# Altium PCB Controller.PcbDoc
Units mil, origin at the board's own origin, x right, y up, seen from the top; angles counter-clockwise.
Board outline 980.28 x 1985.28 mil, 2 copper layers (Top1, Bottom2), stack 63.824 mil thick; 71 components, 71 nets, 314 pads, 182 vias.
Unrouted connection lines stored in the file: 57.
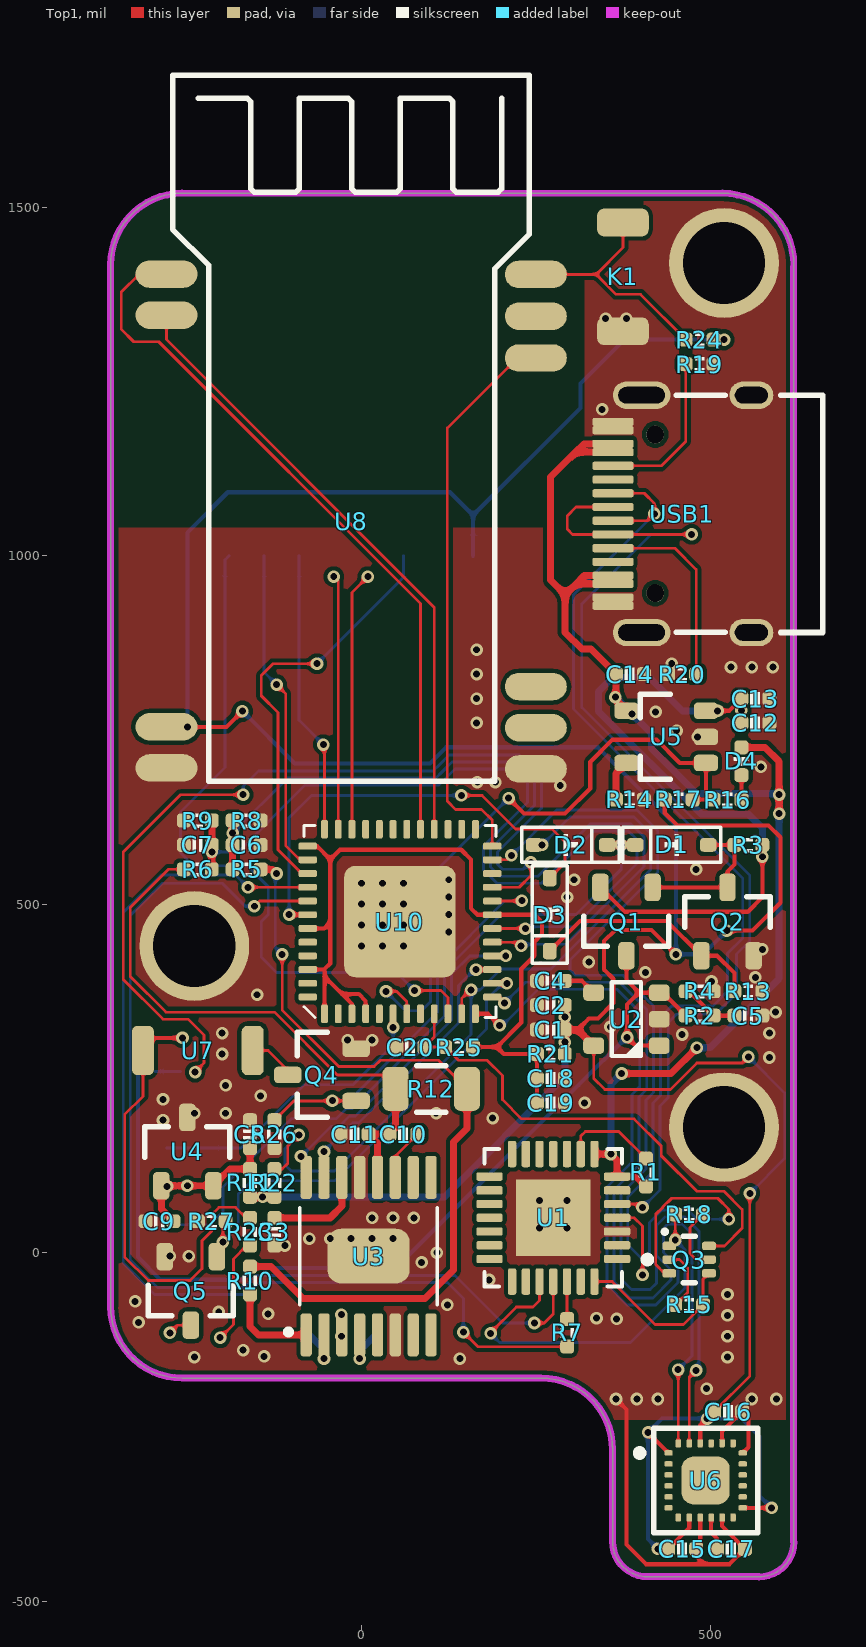
[diagram p0: Top1 view]
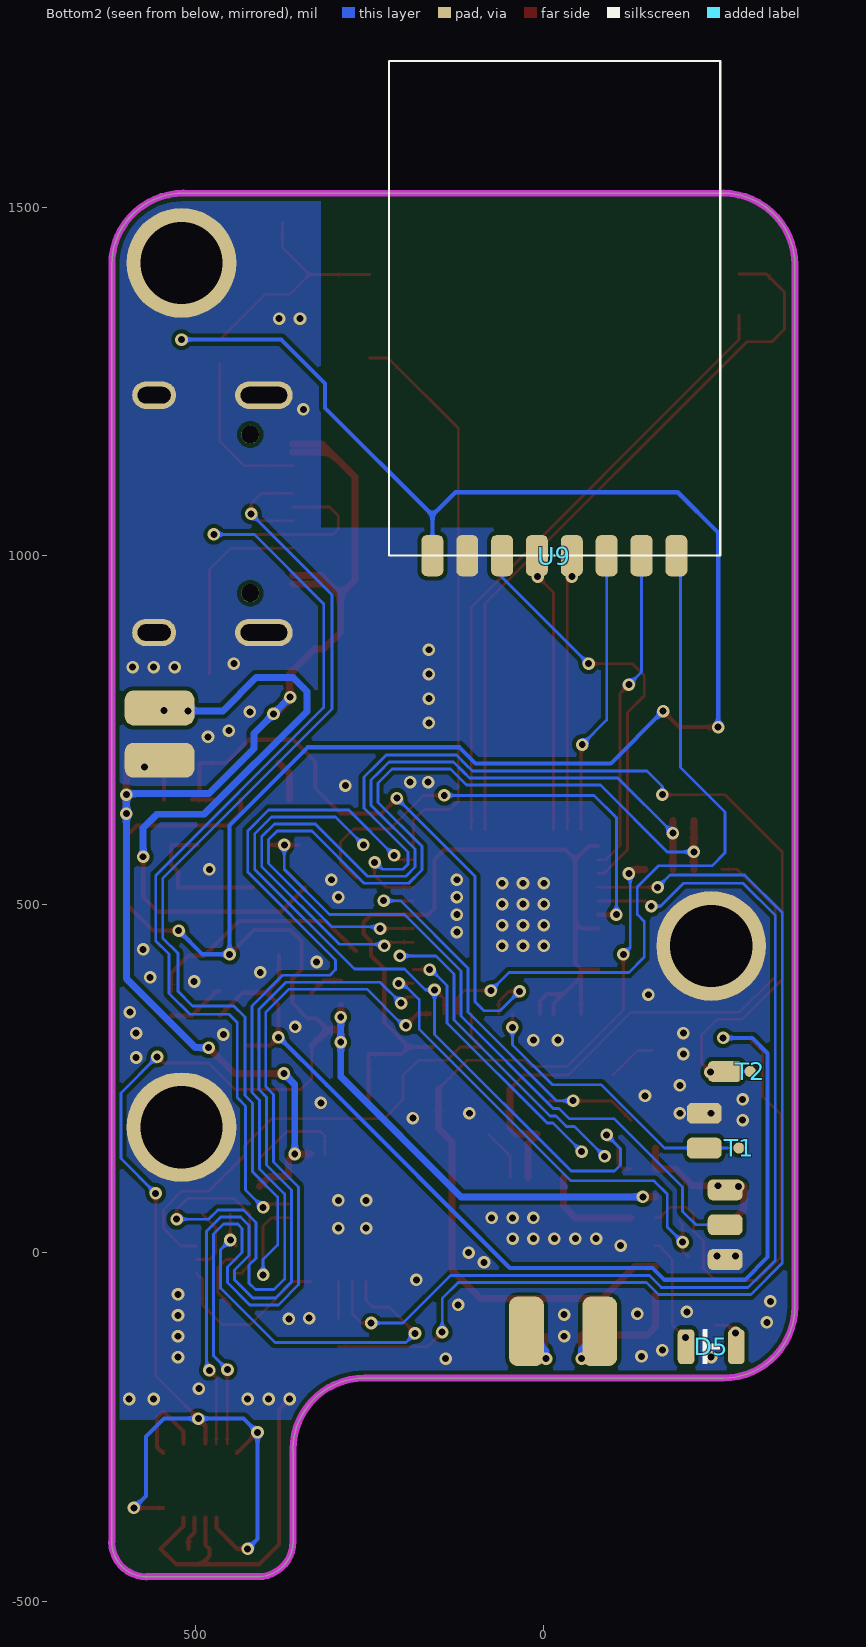
[diagram p1: Bottom2 view, seen from below]
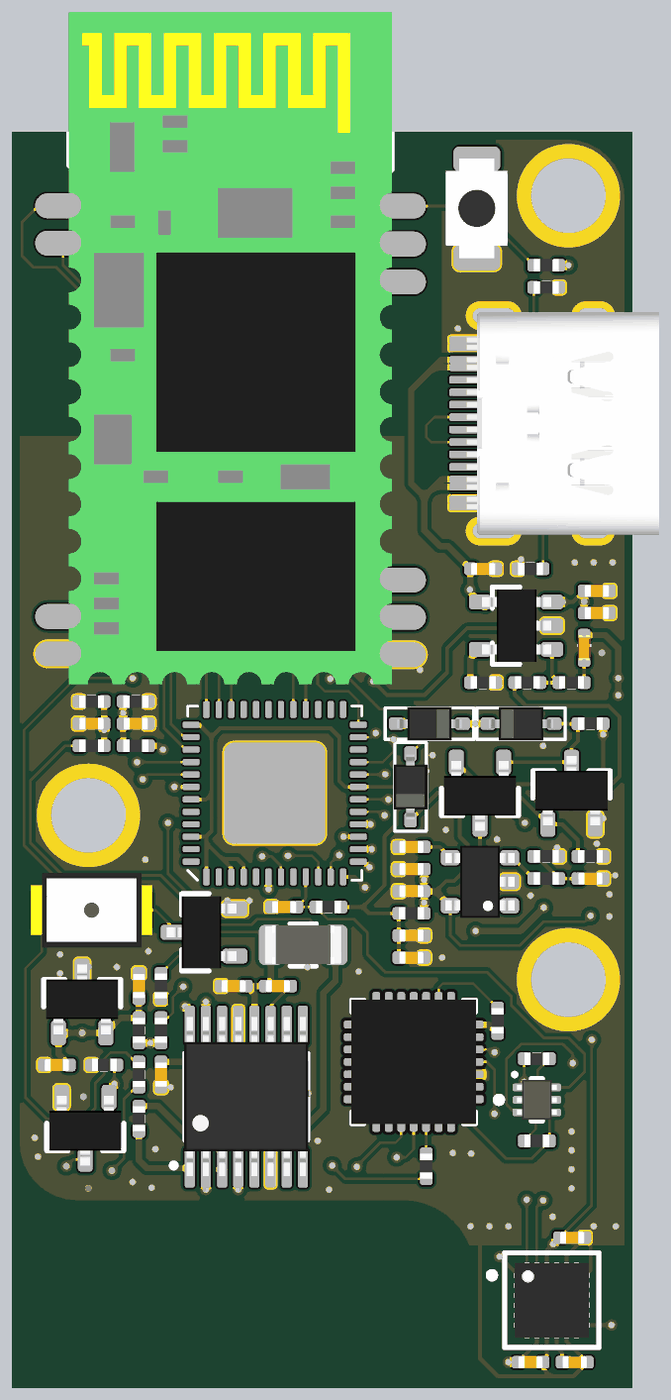
[diagram p2: 3D render of the assembled board from above, using the file's embedded part models]

## Layer stack, top to bottom
Top Solder: solder mask 0.4, Solder Resist, Dk 3.5
Top1: signal copper 1.4
Dielectric1: core 61.0236, FR-4, Dk 4.2
Bottom2: signal copper 1.4
Bottom Solder: solder mask 0.4, Solder Resist, Dk 3.5

## Board outline
-360.03,-77.5 ccw(c-257.5,-77.5) -257.5,-180.03 -257.5,-180 257.5,-180 257.5,-179.97 cw(c257.5,-282.5) 360.03,-282.5 360,-282.5 360,-414.75 ccw(c410.25,-414.75) 410.25,-465 410,-465 570,-465 570,-465.25 ccw(c570,-415) 620.25,-415 620,-415 620,-180 620,1415 620.03,1417.5 ccw(c517.5,1417.5) 517.5,1520.03 520,1520 -257.5,1520 -257.5,1520.03 ccw(c-257.5,1417.5) -360.03,1417.5 -360,1417.5

## Design rules (kind name [scope] priority, off if disabled: settings)
Clearance Clearance_Logo [InNetClass('Logo')] p1: gap=8 ignorepadtopadclearanceinfootprint=FALSE
Clearance [All] p2: gap=6 ignorepadtopadclearanceinfootprint=FALSE
ComponentClearance [All] p1: gap=0 collisioncheckmode=3 verticalgap=0 showdistances=FALSE
DiffPairsRouting [All] p1: maxlimit=9 minlimit=9 mostfreqgap=9 toplayer_minwidth=15 toplayer_maxwidth=15 toplayer_prefwidth=15 bottomlayer_minwidth=15 bottomlayer_maxwidth=15 bottomlayer_prefwidth=15 maxuncoupledlength=500
FanoutControl Fanout_BGA [All] p1: bgadir=Out bgaviamode=Centered fanoutstyle=Auto fanoutdirection=Alternating viagrid=1 // Fanout_BGA (Default Rule)
HoleSize [All] p1: absolutevalues=TRUE maxlimit=10000 minlimit=8 maxpercent=80.000 minpercent=20.000
MinimumSolderMaskSliver [All] p1 off: minsoldermaskwidth=2
PlaneClearance [All] p1: clearance=8
PlaneConnect [All] p1: planeconnectstyle=Direct reliefexpansion=20 reliefentries=4 reliefconductorwidth=10 reliefairgap=10
PolygonConnect [All] p1: connectstyle=Direct reliefconductorwidth=10 reliefentries=4 polygonreliefangle="90 Angle" airgapwidth=10
RoutingVias [All] p1: holewidth=8 width=16 viastyle="Through Hole" minholewidth=6 minwidth=12 maxholewidth=28 maxwidth=50
SilkToSilkClearance [All] p1: silktosilkclearance=0
SilkToSolderMaskClearance [IsPad] p1: minsilkscreentomaskgap=0 clearancetoexposedcopper=TRUE
SolderMaskExpansion [All] p1: expansion=3 istentingtop=FALSE
Width Logo [InNetClass('Logo')] p1: maxlimit=100 minlimit=0.1 preferedwidth=10
Width GND [(InNet('AGND') OR InNet('GND'))] p2: maxlimit=50 minlimit=4 preferedwidth=10
Width VCC [(InNet('VDD_SYS_3.3V') OR InNet('VDD_AV_3.3V') OR InNet('VDD_5V') OR InNet('VDD1V2-SYS') OR InNet('VDD1V1-EPHY') OR InNet('VDD-CPUX') OR InNet('VDD-CPUS') OR InNet('VDD-CPUFB') OR InNet('VCC-DRAM'))] p3: maxlimit=50 minlimit=4 preferedwidth=10
Width [All] p4: maxlimit=10000 minlimit=4 preferedwidth=4
21 further rules are at their usual default settings.

## Components (designator, comment, footprint, x,y, rotation, side; value= is the part's Value field where it differs from the comment)
C1 "0.1uF" CAP_0402 271.5,320 r0 top value=0.1u
C2 "10uF" CAP_0402 271.5,355 r0 top value=0.1u
C3 "2.2uF" CAP_0402 -125,30 r90 top value=0.1u
C4 "10nF" CAP_0402 271.5,390 r0 top value=0.1u
C5 "0.1uF" CAP_0402 555,340 r180 top value=0.1u
C6 "10uF" CAP_0402 -165,585 r180 top value=0.1u
C7 "10uF" CAP_0402 -235,585 r0 top value=0.1u
C8 "10uF" CAP_0402 -160,170 r270 top value=0.1u
C9 "10uF" CAP_0402 -290,45 r0 top value=0.1u
C10 "10nF" CAP_0402 60,170 r0 top value=0.1u
C11 "10uF" CAP_0402 -10,170 r0 top value=0.1u
C12 "10uF" CAP_0402 565,760 r180 top value=0.1u
C13 "0.1uF" CAP_0402 565,795 r180 top value=0.1u
C14 "10uF" CAP_0402 385,830 r180 top value=0.1u
C15 "0.1uF" CAP_0402 460,-425 r0 top value=0.1u
C16 "10nF" CAP_0402 526,-228 r0 top value=0.1u
C17 "0.1uF" CAP_0402 530,-425 r180 top value=0.1u
C18 "10uF" CAP_0402 271.5,250 r180 top value=0.1u
C19 "0.1uF" CAP_0402 271.5,215 r180 top value=0.1u
C20 "1uF" CAP_0402 70,295 r180 top value=0.1u
D1 "二极管-5819W" SOD-323 445,585 r180 top
D2 "二极管-5819W" SOD-323 300,585 r0 top
D3 "二极管-5819W" SOD-323 270,485 r270 top
D4 "color?" LED_0402_RED 545,705 r270 top
D5 "color?" LED_0805_RED -240,-135 r180 bottom
K1 "TACT 2P" ButtonTACT_3x4x2_180 375,1400 r270 top value=3x4
Q1 "AO3401A" SOT23-3 380,475 r270 top
Q2 "AO3400A" SOT23-3 525,475 r90 top
Q3 "BC847BVC-7" SOT563-6 470,-10 r270 top
Q4 "AO3400A" SOT23-3 -57,255 r180 top
Q5 "AO3400A" SOT23-3 -245,-55 r270 top
R1 "10K" RES_0402 408,115 r90 top value=22R
R2 "100K" RES_0402 485,340 r180 top value=22R
R3 "20K" RES_0402 555,585 r180 top value=22R
R4 "100K" RES_0402 485,375 r180 top value=22R
R5 "20K" RES_0402 -165,550 r0 top value=22R
R6 "20K" RES_0402 -235,550 r180 top value=22R
R7 "200R" RES_0402 295,-115 r90 top value=22R
R8 "10K" RES_0402 -165,620 r180 top value=22R
R9 "10K" RES_0402 -235,620 r0 top value=22R
R10 "47K" RES_0402 -160,-40 r90 top value=22R
R11 "120R" RES_0402 -160,100 r90 top value=22R
R12 "1R" 1206-RES 100,235 r0 top value=22R
R13 "20K" RES_0402 555,375 r180 top value=22R
R14 "2K" RES_0402 385,650 r0 top value=22R
R15 "12K" RES_0402 470,-75 r180 top value=22R
R16 "1K" RES_0402 525,650 r180 top value=22R
R17 "10K" RES_0402 455,650 r180 top value=22R
R18 "12K" RES_0402 470,55 r0 top value=22R
R19 "5.1K" RES_0402 485,1275 r180 top value=22R
R20 "5.1K" RES_0402 460,830 r180 top value=22R
R21 "0R" RES_0402 271.5,285 r180 top value=22R
R22 "10K" RES_0402 -125,100 r90 top value=22R
R23 "10K" RES_0402 -160,30 r90 top value=22R
R24 "47K" RES_0402 485,1310 r180 top value=22R
R25 "10K" RES_0402 140,295 r180 top value=22R
R26 "10K" RES_0402 -125,170 r90 top value=22R
R27 "10K" RES_0402 -215,45 r0 top value=22R
T1 "测试点" TEST_PT -280,150.01 r0 bottom
T2 "测试点" TEST_PT -296,260.01 r0 bottom
U1 "CP2102" QFN-28 275,50 r180 top value=Value
U2 "LP2992 3V3" SOT23-5#1 380,335 r180 top
U3 "DRV8833PW" TSSOP-16 10,-5 r90 top
U4 "TL431IDBZT" SOT23-3 -250,145 r90 top
U5 "MCP73831T" SOT23-5#2 435,740 r180 top
U6 "MPU9250" QFN-24-3x3 493.62,-326.85 r0 top
U7 "DET402" DET402 -235,290 r0 top
U8 "HC-06" 蓝牙模块HC-06 -270,628.62 r0 top locked
U9 "NRF24L01" NRF24L01-MODULE 160,1000 r180 bottom
U10 "ESP32_SIP" QFN-48_7X7 55,475 r90 top
USB1 "Type-C" Type-C-TOP 460,1060 r0 top

## Footprints (in the part's own frame and the unit in brackets; to place one, negate y for a bottom-side part, rotate by r counter-clockwise, add the part's x,y. Pads: shape width x height; smd on the part's side, far side on the other; paste and mask are expansions set on the pad)
1206-RES [mil]
  rrect50% 37.64x63.38 smd paste+0 mask+0: 1(-51.22,0) 2(51.22,0)
  silkscreen extent -21,-33 21,33, body extent -61,-31 61,31, height 26
ButtonTACT_3x4x2_180 [mil]
  rrect50% 40x74 smd: 1(-78,0) 2(78,0)
  body extent -79,-49 79,49, height 63
CAP_0402 [mil]
  rrect50% 20x20 smd: 1(-20,0) 2(20,0)
  silkscreen extent -6,-9 6,9, body extent -20,-10 20,10, height 20
DET402 [mm]
  rrect50% 0.8x1.8 smd: 1(-2,0) 2(2,0)
  body extent -2.45,-1.5 2.44,1.5, height 2.03
LED_0402_RED [mil]
  rrect50% 20x20 smd: 1(-20,0) 2(20,0)
  silkscreen extent -6,-11 6,10, body extent -20,-10 20,10, height 18
LED_0805_RED [mil]
  rrect50% 24x50 smd: 1(-36,0) 2(36,0)
  silkscreen extent -12,-24 12,24, body extent -40,-25 40,25, height 43
NRF24L01-MODULE [mm]
  rrect50% 0.8x1.5 smd: 1(0,0) 2(1.27,0) 3(2.54,0) 4(3.81,0) 5(5.08,0) 6(6.35,0) 7(7.62,0) 8(8.89,0)
  silkscreen extent -1.57,0 10.49,18.03
QFN-24-3x3 [mm]
  rrect50% 0.3x0.2 smd paste+0 mask+0: 1(-1.35,1) 2(-1.35,0.6) 3(-1.35,0.2) 4(-1.35,-0.2) 5(-1.35,-0.6) 6(-1.35,-1) 13(1.35,-1) 14(1.35,-0.6) 15(1.35,-0.2) 16(1.35,0.2) 17(1.35,0.6) 18(1.35,1)
  rrect50% 0.2x0.3 smd paste+0 mask+0: 7(-1,-1.35) 8(-0.6,-1.35) 9(-0.2,-1.35) 10(0.2,-1.35) 11(0.6,-1.35) 12(1,-1.35) 19(1,1.35) 20(0.6,1.35) 21(0.2,1.35) 22(-0.2,1.35) 23(-0.6,1.35) 24(-1,1.35)
  rrect50% 1.75x1.75 smd paste-1000 mask+0: 25(0,0)
  silkscreen extent -2.53,-1.9 1.9,1.9, body extent -1.52,-1.52 1.52,1.52, height 1
QFN-28 [mil]
  rrect50% 38x12 smd mask+5: 1(-91.5,59.06) 2(-91.5,39.37) 3(-91.5,19.68) 4(-91.5,0) 5(-91.5,-19.68) 6(-91.5,-39.37) 7(-91.5,-59.06) 15(91.5,-59.06) 16(91.5,-39.37) 17(91.5,-19.68) 18(91.5,0) 19(91.5,19.68) 20(91.5,39.37) 21(91.5,59.06)
  rrect50% 12x38 smd mask+5: 8(-59.06,-91.5) 9(-39.37,-91.5) 10(-19.69,-91.5) 11(0,-91.5) 12(19.68,-91.5) 13(39.37,-91.5) 14(59.06,-91.5) 22(59.06,91.5) 23(39.37,91.5) 24(19.68,91.5) 25(0,91.5) 26(-19.69,91.5) 27(-39.37,91.5) 28(-59.06,91.5)
  rect 106.3x110.24 smd: 29(0,0)
  silkscreen extent -140,-99 99,99, body extent -99,-99 98,98, height 35
QFN-48_7X7 [mm]
  rrect50% 0.675x0.25 smd: 1(-3.363,2.75) 2(-3.363,2.25) 3(-3.363,1.75) 4(-3.363,1.25) 5(-3.363,0.75) 6(-3.363,0.25) 7(-3.363,-0.25) 8(-3.363,-0.75) 9(-3.363,-1.25) 10(-3.363,-1.75) 11(-3.363,-2.25) 12(-3.363,-2.75) 25(3.363,-2.75) 26(3.363,-2.25) 27(3.363,-1.75) 28(3.363,-1.25) 29(3.363,-0.75) 30(3.363,-0.25) 31(3.363,0.25) 32(3.363,0.75) 33(3.363,1.25) 34(3.363,1.75) 35(3.363,2.25) 36(3.363,2.75)
  rrect50% 0.25x0.675 smd: 13(-2.75,-3.363) 14(-2.25,-3.363) 15(-1.75,-3.363) 16(-1.25,-3.363) 17(-0.75,-3.363) 18(-0.25,-3.363) 19(0.25,-3.363) 20(0.75,-3.363) 21(1.25,-3.363) 22(1.75,-3.363) 23(2.25,-3.363) 24(2.75,-3.363) 37(2.75,3.363) 38(2.25,3.363) 39(1.75,3.363) 40(1.25,3.363) 41(0.75,3.363) 42(0.25,3.363) 43(-0.25,3.363) 44(-0.75,3.363) 45(-1.25,3.363) 46(-1.75,3.363) 47(-2.25,3.363) 48(-2.75,3.363)
  rrect20% 4.064x4.064 smd: 49(0,0)
  silkscreen extent -3.5,-3.5 3.5,3.5, body extent -3.5,-3.5 3.5,3.5, height 1
RES_0402 [mil]
  rrect50% 20x20 smd: 1(-20,0) 2(20,0)
  silkscreen extent -7,-10 7,10, body extent -20,-10 20,10, height 14
SOD-323 [mm]
  rrect50% 0.6x0.5 smd: 1(-1.329,0) 2(1.329,0)
  silkscreen extent -1.78,-0.64 1.78,0.64, body extent -1.3,-0.68 1.3,0.67, height 1.15
SOT23-3 [mm] "SOT23, 3-Leads, Body 3.1x3.0mm (max), Pitch 0.95mm, IPC Medium Density"
  rrect50% 1x0.6 smd: 1(-1.246,0.95) 2(-1.246,-0.95) 3(1.246,0)
  silkscreen extent -0.2,-1.55 0.9,1.55, body extent -1.3,-1.45 1.5,1.45, height 1.2
SOT23-5#1 [mil]
  rrect50% 30x24 smd: 1(-47,38) 2(-47,0) 3(-47,-38) 4(47,-38) 5(47,38)
  silkscreen extent -21,-53 21,53, body extent -55,-57 55,57, height 57
SOT23-5#2 [mil] "SOT23, 3-Leads, Body 3.1x3.0mm (max), Pitch 0.95mm, IPC Medium Density"
  rrect50% 35x23.62 smd: 1(-59.06,37.4) 2(-59.06,0) 3(-59.06,-37.4) 4(54.94,-37.4) 5(54.94,37.4)
  silkscreen extent -8,-61 35,61, body extent -58,-57 52,57, height 47
SOT563-6 [mm]
  rrect50% 0.305x0.5 smd paste+0 mask+0: 1(-0.5,-0.723) 2(0,-0.723) 3(0.5,-0.723) 4(0.5,0.723) 5(0,0.723) 6(-0.5,0.723)
  silkscreen extent -1.09,-0.96 0.85,0.23, body extent -0.8,-0.8 0.8,0.8, height 0.6
TEST_PT [mil]
  rrect100% 16x16 smd: 0(0,0.01)
TSSOP-16 [mm]
  rrect50% 1.57x0.41 smd: 1(-2.87,2.275) 2(-2.87,1.625) 3(-2.87,0.975) 4(-2.87,0.325) 5(-2.87,-0.325) 6(-2.87,-0.975) 7(-2.87,-1.625) 8(-2.87,-2.275) 9(2.87,-2.275) 10(2.87,-1.625) 11(2.87,-0.975) 12(2.87,-0.325) 13(2.87,0.325) 14(2.87,0.975) 15(2.87,1.625) 16(2.87,2.275)
  rrect50% 2x3 smd: PAD(0,0)
  silkscreen extent -2.87,-2.5 1.77,3.02, body extent -3.2,-2.5 3.2,2.5, height 1.2
Type-C-TOP [mm]
  round 0.65 hole 0.65: 0(-0.98,-2.89) 0(-0.98,2.89)
  oval 1.6x1 hole 0.6 slot 1.2 at 0 deg: 1(2.52,4.325) 2(2.52,-4.325)
  oval 2.1x1 hole 0.6 slot 1.7 at 0 deg: 3(-1.48,-4.325) 4(-1.48,4.325)
  rrect50% 1.5x0.3 smd: A1(-2.52,-3.35) A4(-2.52,-2.55) A5(-2.52,-1.25) A6(-2.52,-0.25) A7(-2.52,0.25) A8(-2.52,1.25) A9(-2.52,2.55) A12(-2.52,3.35) B1(-2.52,3.05) B4(-2.52,2.25) B5(-2.52,1.75) B6(-2.52,0.75) B7(-2.52,-0.75) B8(-2.52,-1.75) B9(-2.52,-2.25) B12(-2.52,-3.05)
  silkscreen extent -0.22,-4.33 5.12,4.33, body extent -2.57,-4.48 5.18,4.48, height 3.26
蓝牙模块HC-06 [mil]
  oval 88.74x39.37 smd: 1(-10,775.43) 2(-10,716.38) 12(-10,125.83) 13(-10,66.77) 22(520,65.43) 23(520,124.49) 24(520,183.54) 32(520,655.04) 33(520,715) 34(520,775)
  silkscreen extent -1,48 511,1061, body extent -1,19 511,1082, height 163

## Part data
C1 C2 C3 C4 C5 C6 C7 C8 C9 C10 C11 C12 C13 C14 C15 C16 C17 C18 C19 C20: library part 电容-0402, "Capacitor"
D1 D2 D3: "40V"
D4: library part LED_0402, "LED", Type=0402
D5: library part LED_0805, "LED", Type=IR
K1: library part ButtonTACT_3x4x2_180, "Button", Type="TACT 2P"
Q1: "P-MOS"
Q2 Q4 Q5: "N-MOS"
R1 R2 R3 R4 R5 R6 R7 R8 R9 R10 R11 R13 R14 R15 R16 R17 R18 R19 R20 R21 R22 R23 R24 R25 R26 R27: library part 电阻-0402, "Resistor"
R12: library part 电阻-1206, "Resistor"
U1: "USB转TTL", MFG #1="SILICON LABS", PART DESC="SINGLE-CHIP USB TO UART BRIDGE, QFN28, RoHS.", PART NUMBER=CP2102, RefDes=RefDes, Type=DEV
U2: library part LP2992, "LDO"
U4: "Adjustable precision shunt regulator 3-SOT-23 -40 to 85", Package="SOT-23-3 Texas Instruments", Availability=Warning, Check_prices=https://www.snapeda.com/parts/TL431IDBZT/Texas%20Instruments/view-part/1206577/?ref=eda, MF="Texas Instruments", MP=TL431IDBZT, Price=None, Purchase-URL=https://pricing.snapeda.com/search/part/TL431IDBZT/?ref=eda, SnapEDA_Link=https://www.snapeda.com/parts/TL431IDBZT/Texas%20Instruments/view-part/1206577/?ref=snap
U6: "IC IMU ACCEL/GYRO/MAG I2C/SPI 24QFN", Digikey Part Number=1428-1019-1-ND, Manufacturer="TDK InvenSense", Mouser Part Number=410-MPU-9250, Package=QFN24, PART NUMBER=MPU-9250, Temperature="-40°C to +85°C", Temperature Range High=+85°C, Temperature Range Low=-40°C, ComponentLink1Description=Upverter, ComponentLink1URL=https://upverter.com/upn/revision/45d9ab674e6b8452/, ComponentLink2Description=Datasheet, ComponentLink2URL=https://store.invensense.com/datasheets/invensense/MPU9250REV1.0.pdf, Digikey Description="IC IMU ACCEL/GYRO/MAG I2C/SPI 24QFN", helpURL=https://upverter.com/upn/revision/45d9ab674e6b8452/, Ipc Land Pattern Name=QFN40P300X300X100-24, Lead Free=yes, RoHS=TRUE, Supplier 1=Digi-Key, Supplier 2=Mouser, Supplier Part Number 1=1428-1019-1-ND, Supplier Part Number 2=410-MPU-9250
U8: library part 蓝牙模块HC-06
U9: library part NRF24L01模块
U10: library part ESP32-PICO
USB1: library part USB-Type-C-TOP
U3: SnapEDA_Link=https://www.snapeda.com/parts/DRV8833PW/Texas%20Instruments/view-part/507725/?ref=snap

## Free pads (board coordinates)
  rrect50% 50x30 smd far side: ""(-260,-10) ""(-260,40) ""(-260,90) ""(-260,260) ""(-230,150) ""(-230,200)
  round 157.48 hole 118.11: ""(-240,440) ""(520,180) ""(520,1420)
  rrect50% 50x100 smd far side: ""(-80,-113) ""(25,-113)
  rrect50% 100x50 smd far side: ""(551.5,706.5) ""(551.5,781.5)

## Via types
v1: diameter 18, hole 10, Top1 to Bottom2, tented both sides, 182 vias

## Nets (pads, with @x,y where several pads share a name; then routed paths per layer and width w, separated by ;. In a path a pad name is that pad's centre, name@x,y a point inside that pad or via, vN(x,y) a via of type N, cw(c..) or ccw(c..) an arc to the next point about the centre after c; other vN are vias at no path point)
3V3A: C18.2 C19.2 R21.2 R25.1 U10.1 U10.3 U10.4 U10.19 U10.37 U10.43 U10.46 | length 1216.2
  Top1 w6: U10.46 -53.9,406.1 -45,415 -45,474 ; U10.43 -53.84,465.16 -45,474 ; U10.37 -64.27,583.27 -45,564 ; U10.1 -53.27,396.27 ; -53.27,405.47 -53.27,396.27 ; U10.3 -13.9,356.9 -28,371 ; U10.4 5.79,361.21 -4,371 -28,371 ; R25.1 194,295 ; C19.2 C18.2 R21.2 204,285 194,295 ; -53.27,396.27 -28,371 ; -45,474 -45,564 ; -45,564 -31,578 143,578 157,564 157,494 166.16,484.84 U10.19 248.16,484.84 259,474 259,457 248,446 248,426 229,407 229,330 194,295
BAT_DET_1: C5.2 R2.1 R4.2 | length 84.5
  Top1 w6: R4.2 470,375 R2.1 C5.2
BOOT_1: Q3.3 U10.23 | length 1594.8
  Top1 w4: U10.23 208.58,563.58 v1(215,570) ; Q3.3 434.69,-29.68 422,-17 422,55 432,65 432,65.38 439.62,73 440,73 445,78 511,78 527,62 v1(527,48)
  Bottom2 w4: v1(215,570) 280,635 395,635 425,605 425,546 299,420 299,406 307,398 375,398 419,354 419,229.72 408,218.72 408,120.14 372,84.14 372,-37.72 387.28,-53 414,-53 423,-44 423,-18 413,-8 413,43 431,61 467.86,61 480.86,48 v1(527,48)
BT_SET_1: K1.1 R24.2 U8.34 | length 344.1
  Top1 w4: U8.34 336.62,1403.62 ; K1.1 375,1442 336.62,1403.62 ; R24.2 400,1375 365.24,1375 336.62,1403.62
BUZZ_1: Q4.1 R26.2 U10.20 | length 599.1
  Top1 w4: R26.2 -97.4,217.6 Q4.1 ; U10.20 229.53,504.53 v1(230,505)
  Bottom2 w4: v1(-42,218) -18,218 109,345 109,408 206,505 v1(230,505)
CHG_DET_1: R16.2 R17.1 U5.1 U10.7 | length 932.2
  Top1 w4: v1(35,375) 50,375 64.84,360.16 U10.7
  Top1 w6: v1(211,652) 233,630 292,630 328,666 328,704 360,736 423,736 456.4,702.6 U5.1 494.06,660.94 R16.2 R17.1
  Bottom2 w4: v1(35,375) 63,347 86,347 99,360 99,540 v1(211,652)
CP_Rx_1: U1.25 U10.41 | length 1495.5
  Top1 w4: v1(-154,497) -146.47,504.53 U10.41 ; v1(248,-101) 262,-101 275,-88 U1.25
  Bottom2 w4: v1(-154,497) -167,497 -200,530 -285.86,530 -332,483.86 -332,-10.86 -292.86,-50 -168.44,-50 -151.44,-33 134,-33 202,-101 v1(248,-101)
CP_Tx_1: R7.1 U10.40 | length 1526.4
  Top1 w4: v1(-163,524) -162.79,524.21 U10.40 ; v1(146,-114) 167,-135 R7.1
  Bottom2 w4: v1(-163,524) -181,542 -288,542 -342,488 -342,-15 -297,-60 -164.3,-60 -147.3,-43 123,-43 146,-66 v1(146,-114)
DTR_1: Q3.4 R15.1 U1.28 | length 241.8
  Top1 w4: U1.28 359.5,-41.5 421,-103 462,-103 R15.1 490,-38.15 Q3.4
EC_KEY_1: D1.2 D2.2 pad.@-260,40 | length 977.3
  Top1 w6: D2.2 D1.2
  Bottom2 w4: pad.@-260,40 -218,40 -199,59 -199,94 -101,192 -36.7,192 -21.7,207 -13.44,207 119,339.44 119,403.86 200.14,485 307.43,485 372.5,550.07 v1(372.5,585)
EC_KEY_DET_1: D2.1 R22.2 U10.11 | length 1140.6
  Top1 w4: R22.2 -114,120 -106,128 -106,153 v1(-90,169) ; U10.11 143.58,364.58 156,377 v1(157,377)
  Bottom2 w4: v1(-90,169) -110,149 -110,126 -101,117 -39.14,117 157,313.14 v1(157,377) 170,377 200,407 271.86,407 415,550.14 415,600.86 390.86,625 299,625 v1(259,585)
ESP_EN_1: C20.1 Q3.6 R25.2 U10.9 | length 719.4
  Top1 w4: U10.9 104.21,309.21 C20.1 R25.2 139,276 180,276 202,254 202,219.5 229.5,192 391,192 430,153 430,139 481,88 520,88 546,62 546,35 520.69,9.68 Q3.6
FLASH_CLK_1: U10.31
FLASH_CS_1: U10.25
FLASH_SD0_1: U10.27
FLASH_SD1_1: U10.33
FLASH_SD2_1: U10.30
FLASH_SD3_1: U10.32
GND: C1.1 C2.1 C3.1 C4.1 C5.1 C6.1 C7.1 C8.1 C9.1 C11.1 C12.1 C13.1 C14.1 C15.2 C16.2 C17.1 C18.1 C19.1 C20.2 K1.2 pad.@520,180 pad.@520,1420 pad.@551.5,706.5 pad.@-230,200 pad.@-240,440 pad.@-260,-10 Q2.2 Q4.2 Q5.2 R4.1 R8.1 R9.1 R13.1 R14.2 R19.1 R20.2 R26.1 R27.1 U1.3 U1.29 U2.2 U3.3 U3.6 U3.13 U3.PAD U4.3 U5.2 U6.9 U6.11 U6.18 U6.20 U8.13 U8.22 U9.2 U10.49 USB1.1 USB1.2 USB1.3 USB1.4 USB1.A1 USB1.A12 USB1.B1 USB1.B12 | length 663.1
  Top1 w6: v1(365,-210) 380,-225 380,-419 408,-447 492,-447 ; U6.9 485.75,-419.25 C15.2 480,-435 492,-447 ; U6.11 517.24,-392.24 C17.1 528,-447 492,-447 ; U6.20 517.24,-256.76 C16.2 555,-237 555,-279.25 U6.18
  other v1: 395,-210 425,-210 560,-210 595,-210 495,-195 141,-152 -240,-150 525,-150 -140,-149 -170,-140 -29,-120 525,-120 -320,-100 366,-95 337,-94 525,-90 -29,-89 -134,-88 -205,-85 123,-75 -325,-70 525,-60 183,-39 86,-14 -275,-5 -248,-5 108,0 -110,10 -75,20 -45,20 -15,20 15,20 45,20 255,35 295,35 15,50 45,50 75,50 255,75 295,75 -285,190 188,193 -240,200 -195,200 107,200 320,215 -285,220 -145,225 -195,240 585,280 -200,285 -20,305 15,305 460,313 -200,315 585,315 357,324 594,345 -150,370 502,389 565,395 407,402 326,417 575,435 0,440 30,440 60,440 125,460 0,470 30,470 60,470 125,485 0,500 30,500 60,500 125,510 295,510 0,530 30,530 60,530 125,535 305,535 480,550 285,670 166,675 192,675 573,697 482,740 452,749 165,760 422,776 165,795 165,830 530,840 560,840 590,840 445,845 165,865 345,1210 350,1340 380,1340
GPIO2_1: U10.22
GPIO4_1: U8.32 U10.24 | length 817
  Top1 w4: U10.24 187.38,620.62 172,636 134.65,636 123,647.65 123,1183 223.66,1283.66 U8.32
GPIO5_1: U9.4 U10.34 | length 372.1
  Top1 w4: U10.34 -13.9,947.1 v1(9,970)
GPIO9_1: U8.2 U10.28 | length 896.8
  Top1 w4: U8.2 -280,1310 104.21,925.79 U10.28
GPIO10_1: U8.1 U10.29 | length 1045.3
  Top1 w4: U8.1 -318.94,1404.06 -345,1378 -345,1325 -327,1307 -291.14,1307 84.53,931.33 U10.29
GPIO12_1: C7.2 R6.1 R9.2 U10.18 | length 1276.3
  Top1 w4: U10.18 234.84,465.16 v1(235,465)
  Top1 w10: R6.1 R9.2
  Bottom2 w4: v1(-215,575) -177,575 -81,671 110.84,671 133.84,694 218,694 238,674 238,646 175,583 175,549 194,530 258,530 333,605 382.57,605 395,592.57 395,558.43 304.03,467.45 237.45,467.45 v1(235,465)
GPIO14_1: C6.2 R5.1 R8.2 U10.17 | length 1281.4
  Top1 w4: U10.17 224.53,445.47 229,441 v1(229,440)
  Top1 w10: R5.1 C6.2 v1(-185,602) R8.2
  Bottom2 w4: v1(-185,602) -106,681 106.7,681 115.7,690 129.7,704 222.14,704 236.14,690 248,678.14 248,665.14 248,641.86 242,635.86 185,578.86 185,553.14 198.14,540 253.07,540 328.07,615 386.72,615 405,596.72 405,554.28 293.17,442.45 231.45,442.45 v1(229,440)
GPIO15_1: pad.@-260,260 T2.0 U10.21 | length 1392.1
  Top1 w4: v1(-239,259) -226,272 -226,312 -249,335 -285,335 -342,392 -342,575 -260,657 v1(-170,657) ; U10.21 226.21,524.21 243,541 v1(243,560)
  Bottom2 w4: T2.0 pad.@-260,260 ; v1(-170,657) -170,669 -148,691 102.56,691 111.56,700 125.56,714 226.28,714 240.28,700 258,682.28 258,670 258,637.72 195,574.72 195,557.28 202.28,550 231.79,550 241.79,560 v1(243,560)
GPIO18_1: U9.5 U10.35 | length 365.3
  Top1 w4: v1(-40,970) -33.58,963.58 -33.58,785.58 U10.35
GPIO19_1: U9.7 U10.38 | length 468.9
  Top1 w4: v1(-122,815) -109,802 -109,584 -88.58,563.58 U10.38
  Bottom2 w4: U9.7 -140,833 v1(-122,815)
GPIO21_1: D3.1 U10.42 | length 663.5
  Top1 w4: v1(143,656) 173,656 221,608 273,608 292,589 292,559.34 D3.1
  Top1 w6: v1(-104,485) -103.84,484.84 U10.42
  Bottom2 w4: v1(-104,485) -104,624 -72,656 v1(143,656)
GPIO22_1: U9.3 U10.39 | length 610.1
  Top1 w4: U10.39 -85.9,543.9 -120,578 -120,775 -144,799 -144,828 -127,845 v1(-64,845)
  Bottom2 w4: v1(-64,845) 60,969 U9.3
GPIO23_1: U9.6 U10.36 | length 407.8
  Top1 w4: v1(-55,729) -53.27,727.27 U10.36
  Bottom2 w4: U9.6 -90,764 v1(-55,729)
GPIO25_1: Q5.1 R27.2 U10.14 | length 690.6
  Top1 w4: Q5.1 -199,2.65 v1(-199,15) -199,41 R27.2 ; U10.14 v1(208.42,386.42)
  Bottom2 w4: v1(-199,15) -177,37 -177,84 -158,103 -39,103 179,321 179,363 202.42,386.42 v1(208.42,386.42)
GPIO26_1: U3.15 U10.15 | length 380.8
  Top1 w4: v1(164.1,406.1) U10.15
  Bottom2 w4: v1(-54,145) -13,186 -4.75,186 139,329.75 139,383.04 162.06,406.1 v1(164.1,406.1)
GPIO27_1: U3.16 U10.16 | length 471
  Top1 w4: U10.16 v1(206.79,425.79)
  Bottom2 w4: v1(-87,138) -44,181 -32.14,181 -17.14,196 -8.89,196 129,333.89 129,399.72 155.07,425.79 v1(206.79,425.79)
GPIO32_1: U6.24 U10.12 | length 1260.2
  Top1 w4: v1(454,-168) 454.25,-168.25 U6.24
  Top1 w6: U10.12 181.38,342.62 v1(198,326)
  Bottom2 w4: v1(198,326) 202,326 254,378 366,378 399,345 399,238 388,227 388,130.14 352,94.14 352,-46 381,-75 422,-75 454,-43 454,-20.72 433,0.28 433,34.72 439.28,41 459.57,41 474,26.57 474,-148 v1(454,-168)
GPIO33_1: U6.23 U10.13 | length 1237.7
  Top1 w4: U10.13 196.27,366.73 v1(205,358) ; U6.23 470,-179 v1(480,-169)
  Bottom2 w4: v1(205,358) 235,388 370.14,388 409,349.14 409,233.86 398,222.86 398,126 362,90 362,-41.86 385.14,-65 417.86,-65 444,-38.86 444,-24.86 423,-3.86 423,38.86 435.14,51 463.72,51 484,30.72 484,-102.32 484,-165 v1(480,-169)
GPIO34_1: U9.8 U10.10 | length 1021.9
  Top1 w4: v1(76,376) 114,376 123.9,366.1 U10.10
  Bottom2 w4: U9.8 -196,994 -196,696 -260,632 -260,573.75 -241.25,555 -164,555 -134,525 -134,485 -144,475 -144,424 -122,402 50,402 v1(76,376)
GPIO37_1: pad.@-230,150 T1.0 U10.6 | length 431
  Top1 w4: v1(45.16,323.16) U10.6
  Bottom2 w4: T1.0 -230,150 -173,150 -82,241 -12,241 45.16,298.16 v1(45.16,323.16)
MOTOR_A_1_1: pad.@-80,-113 U3.2 | length 83.8
  Top1 w10: v1(-54,-152) U3.2
  Bottom2 w10: pad.@-80,-113 -54,-139 v1(-54,-152)
MOTOR_A_2_1: pad.@25,-113 U3.4 | length 84.7
  Top1 w6: v1(-3,-152) -3,-118.2 U3.4
  Bottom2 w10: v1(-3,-152) -3,-141 pad.@25,-113
NetC3_2: C3.2 U3.14 | length 144.9
  Top1 w10: C3.2 -45,50 -28.39,66.61 U3.14
NetC4_2: C4.2 U2.4 | length 48.5
  Top1 w6: C4.2 316,390 U2.4
NetC10_2: C10.2 U3.11 | length 75.1
  Top1 w4: U3.11 48.39,138.39 C10.2
NetC17_2: C17.2 U6.10 | length 48.5
  Top1 w6: U6.10 501.5,-401.5 510,-410 C17.2
NetD1_1: D1.1 Q1.1 Q2.3 R3.2 | length 210.3
  Top1 w6: Q1.1 Q2.3 525,547 535,557 R3.2 D1.1
NetD3_2: D3.2 Q2.1 R13.2 | length 340
  Top1 w6: D3.2 313.34,476 437.54,476 Q2.1 510.06,425.94 535,401 R13.2
NetD4_2: D4.2 R16.1 | length 35
  Top1 w6: R16.1 D4.2
NetD5_1: D5.1 R23.1 | length 152.7
  Top1 w4: v1(-203,-122) -184,-103 -184,-9 -165,10 R23.1
NetD5_2: D5.2 Q5.3 | length 34.5
  Top1 w4: v1(-275,-115) -264.06,-104.06 Q5.3
NetQ3_2: Q3.2 R15.2 | length 91.9
  Top1 w4: Q3.2 456,-10 468,-22 468,-57 R15.2
NetQ3_5: Q3.5 R18.2 | length 95.1
  Top1 w4: R18.2 471,36 471,-1 480,-10 Q3.5
NetQ4_3: Q4.3 U7.2 | length 71.7
  Top1 w4: U7.2 -134.06,290 Q4.3@-99.06,255
NetR1_2: R1.2 U1.9 | length 138.4
  Top1 w4: U1.9 314.37,167.37 321,174 369,174 R1.2
NetR7_2: R7.2 U1.26 | length 53.2
  Top1 w4: R7.2@294.69,-94.68 U1.26
NetR10_1: R10.1 U3.1 | length 131.4
  Top1 w10: R10.1 -160,-106 -148.01,-117.99 U3.1
NetR14_1: R14.1 U5.5 | length 58.8
  Top1 w10: R14.1 365,687.54 U5.5
NetR19_2: R19.2 USB1.B5 | length 229.8
  Top1 w4: USB1.B5 429.9,1128.9 465,1164 R19.2
NetR20_1: R20.1 USB1.A5 | length 282
  Top1 w4: USB1.A5 449.21,1010.79 480,980 R20.1
RTS_1: Q3.1 R18.1 U1.24 | length 558.1
  Top1 w4: v1(185,-116) 185,-115 222,-78 246,-78 255.32,-68.68 U1.24 ; Q3.1 v1(450,18.15) R18.1
  Bottom2 w4: v1(185,-116) 198,-129 386,-129 464,-51 464,4.15 v1(450,18.15)
SENSE_1_N: C10.1 C11.2 R6.2 R12.1 U3.12 | length 812.1
  Top1 w4: R6.2 -277,550 -332,495 -332,396.14 -280.86,345 -125,345 -35,255 28.78,255 R12.1
  Top1 w10: U3.12 22.8,157.2 C11.2 C10.1 48.78,178.78 R12.1
SENSOR_VN_1: U10.8
SENSOR_VP_1: U10.5
USB-PWR-DM_1: U1.5 USB1.A7 USB1.B7 | length 1571.3
  Top1 w4: USB1.A7 307.84,1069.84 295,1057 295,1038 302.53,1030.47 USB1.B7 v1(473.53,1030.47) ; U1.5 398.32,69.68 v1(403,65)
  Bottom2 w4: v1(403,65) 428,90 428,210.43 440,222.43 440,330 452,342 508,342 538,372 538,428.34 557,447.34 557,541.14 316,782.14 316,931 415.47,1030.47 v1(473.53,1030.47)
USB-PWR-DP_1: U1.4 USB1.A6 USB1.B6 | length 1607.3
  Top1 w4: USB1.A6 410.16,1050.16 v1(420,1060) 420,1075 405.47,1089.53 USB1.B6 ; U1.4 391,50 403,38 v1(403,-32)
  Bottom2 w4: v1(403,-32) 403,-10 382,11 382,80 418,116 418,214.57 429,225.57 429,338 445,354 504,354 525,375 525,429.48 547,451.48 547,537 304,780 304,944 v1(420,1060)
VBAT: Q1.3 R2.2 R23.2 U2.1 U2.3 U7.1 | length 2140.4
  Top1 w4: U7.1 -313.74,224.26 -340,198 -340,39 -340,-6 -306,-40 -246,-40 -229,-23 -229,17 -215,31 -215,54.84 -204.84,65 -181,65 -166,50 R23.2
  Top1 w6: U7.1 -295.74,308 v1(-257,308) ; Q1.3 380,391 398,373 ; U2.1 393,297 v1(381,309) 381,356 398,373 ; R2.2 432,373 U2.3 398,373
  Bottom2 w6: v1(-257,308) -299,308 -321,286 -321,-6.3 -288.3,-39 -173,-39 -156,-22 49,-22 312,241 380,309 v1(381,309)
VBAT_IN: C12.2 C13.2 pad.@551.5,781.5 Q1.2 R3.1 U5.3 | length 996.4
  Top1 w6: Q1.2 377.65,489 554,489 575,510 v1(575,568) R3.1 ; U5.3 v1(510.73,777.4) 527.4,777.4 C13.2 C12.2
  Bottom2 w10: v1(510.73,777.4) 460.6,777.4 413,825 360,825 340,805 340,776.53 487.53,629 555,629 575,609 v1(575,568)
  other v1: 545,778
VCC_3V3: C1.2 C2.2 C15.1 C16.1 R11.1 R17.2 R21.1 R22.1 R24.1 U2.5 U6.1 U6.8 U6.13 U6.22 U8.12 U9.1 | length 5296.2
  Top1 w4: U2.5 333,250 349,234 443,234 481,272 546,272 v1(555,281) ; C16.1 557,-177 v1(557,85)
  Top1 w6: v1(-250,754) -194,754 v1(-171,777) ; 310,320 326,336 339,336 361,358 361,393 348,406 348,447 364,463 416,463 v1(451,428) ; v1(410.99,-258) U6.1 ; v1(425,-425) C15.1 470,-395 U6.8 ; R17.2 435,631 453,613 584,613 601,596 601,502 561,462 v1(524,462) ; U6.22 485.75,-248.25 v1(495.87,-238.13) C16.1 ; U6.13 v1(588.22,-366.22)
  Top1 w10: R11.1 v1(-142,80) R22.1 ; R21.1 v1(291.5,302) C1.2 ; C2.2 v1(291.5,338) C1.2 ; U2.5 310,320 C1.2
  Bottom2 w4: v1(555,281) 607,229 607,135 v1(557,85)
  Bottom2 w6: v1(-250,754) -250,1033 -192,1091 127,1091 160,1058 ; v1(-171,777) -96,702 98,702 121,725 339,725 451,613 v1(451,428) 490,428 v1(524,462) ; U9.1 160,1058 ; v1(425,-425) 410.99,-410.99 v1(410.99,-258) 430.87,-238.13 v1(495.87,-238.13) 545.13,-238.13 571,-264 571,-349 v1(588.22,-366.22) ; v1(520,1310) 377,1310 314,1247 314,1212 160,1058
  Bottom2 w10: v1(-142,80) 119,80 291.5,252.5 v1(291.5,302) v1(291.5,338)
VCC_5V: R5.2 R10.2 R12.2 | length 1141.9
  Top1 w4: v1(-114,428) -114,348.14 -32.86,267 18,267 27,276 110.22,276 R12.2
  Top1 w10: R10.2 -130,-20 -84,-66 91,-66 132,-25 132,159 151.22,178.22 R12.2 ; R5.2 -128,550 v1(-122,544)
  Bottom2 w4: v1(-122,544) -124,542 -124,438 v1(-114,428)
VREF_2V5: C8.2 C9.2 pad.@-260,90 R11.2 U4.1 U4.2 | length 225.5
  Top1 w10: C9.2 -287.4,62.4 U4.1 v1(-250,95.94) U4.2 -188.54,120 R11.2 C8.2
  other v1: -279,95
VUSB: C14.2 D4.1 R1.1 U1.7 U1.8 U5.4 USB1.A4 USB1.A9 USB1.B4 USB1.B9 | length 1902.9
  Top1 w10: U1.8 v1(357.5,141.5) 366.5,132.5 U1.7 393.94,109.06 R1.1 ; USB1.A4 307.61,959.61 ; USB1.B9 319.42,971.42 307.61,959.61 ; USB1.B4 307,1148.58 ; USB1.A9 318.81,1160.39 307,1148.58 ; v1(373,257) 444,257 v1(481,294) ; U5.4 365,792.46 C14.2 329,866 316,866 292,890 292,944 ; D4.1 579,725 599,705 v1(599,657) v1(599,630) ; 292,944 271,965 271,1112.58 307,1148.58 ; 292,944 307.61,959.61
  Bottom2 w10: v1(357.5,141.5) 357.5,241.5 v1(373,257) ; v1(364,797) v1(388,773) 416,745 416,723.15 480.65,658.51 597.49,658.51 v1(599,657) v1(599,630) 599,393 500,294 v1(481,294)
pads on no net: U1.1 U1.2 U1.6 U1.10 U1.11 U1.12 U1.13 U1.14 U1.15 U1.16 U1.17 U1.18 U1.19 U1.20 U1.21 U1.22 U1.23 U1.27 U3.5 U3.7 U3.8 U3.9 U3.10 U6.2 U6.3 U6.4 U6.5 U6.6 U6.7 U6.12 U6.14 U6.15 U6.16 U6.17 U6.19 U6.21 U6.25 U8.23 U8.24 U8.33 U10.2 U10.26 U10.44 U10.45 U10.47 U10.48 USB1.0 USB1.A8 USB1.B8

## Polygon pours and split planes (outlines as drawn)
GND on Top1 "GND_L01_P000" (solid, remove dead copper, pour order 0): -360,1520 620,1520 620,-240 -360,-240
GND on Bottom2 "GND_L02_P001" (solid, remove dead copper, pour order 1): -360,1520 620,1520 620,-240 -360,-240

## Keep-outs
Keep-Out Layer:
  lines w10: -257.5,-180.03 cw(c-257.5,-77.5) -360.03,-77.5 -360,1417.5 cw(c-257.5,1417.5) -257.5,1520.03 520,1520 ; -257.5,-180 257.5,-180 cw(c257.5,-282.5) 360.03,-282.5 ; 360,-282.5 360,-414.75 ccw(c410.25,-414.75) 410.25,-465 ; 410,-465 570,-465 ; 517.5,1520.03 cw(c517.5,1417.5) 620.03,1417.5 ; 570,-465.25 ccw(c570,-415) 620.25,-415 ; 620,-415 620,-180 620,1415

## Other copper
Top1:
  pour cut-out: 320,1580 320,1040 -400,1040 -400,1580
  pour cut-out: 360,-240 620,-240 620,-480 360,-480
Bottom2:
  pour cut-out: 320,1580 320,1040 -400,1040 -400,1580
  pour cut-out: 360,-240 620,-240 620,-480 360,-480

## Silkscreen, mask and mechanical layers (free items; w line width, h text height)
Mechanical 1:
  lines w10: -257.5,-180.03 cw(c-257.5,-77.5) -360.03,-77.5 -360,1417.5 cw(c-257.5,1417.5) -257.5,1520.03 520,1520 ; -257.5,-180 257.5,-180 cw(c257.5,-282.5) 360.03,-282.5 ; 360,-282.5 360,-414.75 ccw(c410.25,-414.75) 410.25,-465 ; 410,-465 570,-465 ; 517.5,1520.03 cw(c517.5,1417.5) 620.03,1417.5 ; 570,-465.25 ccw(c570,-415) 620.25,-415 ; 620,-415 620,-180 620,1415
Drill Drawing:
  circle w10: c-319.38,2382.28 r33.33
  lines w10: -352.71,2498.94 -286.04,2498.94 -286.04,2565.61 -352.71,2565.61 -352.71,2498.94 ; -352.71,2665.61 -336.04,2665.61 -336.04,2648.94 -302.71,2648.94 -302.71,2665.61 -286.04,2665.61 -286.04,2698.94 -302.71,2698.94 -302.71,2715.61 -336.04,2715.61 -336.04,2698.94 -352.71,2698.94 -352.71,2665.61 ; -352.71,2815.61 -336.04,2815.61 -319.38,2798.94 -302.71,2815.61 -286.04,2815.61 -302.71,2832.28 -286.04,2848.94 -302.71,2848.94 -319.38,2865.61 -336.04,2848.94 -352.71,2848.94 -336.04,2832.28 -352.71,2815.61 ; -352.71,2948.94 -319.38,2965.61 -286.04,2948.94 -302.71,2982.28 -286.04,3015.61 -319.38,2998.94 -352.71,3015.61 -336.04,2982.28 -352.71,2948.94
  lines w15: -412.5,2303.94 12815.78,2303.94 ; -412.5,3053.94 12815.78,3053.94 ; 138.38,2153.94 138.38,3203.94 ; 728.22,2153.94 728.22,3203.94 ; 1847.89,2153.94 1847.89,3203.94 ; 2353.77,2153.94 2353.77,3203.94 ; 3087.57,2153.94 3087.57,3203.94 ; 4277.23,2153.94 4277.23,3203.94 ; 4867.07,2153.94 4867.07,3203.94 ; 5612.87,2153.94 5612.87,3203.94 ; 6802.52,2153.94 6802.52,3203.94 ; 7656.29,2153.94 7656.29,3203.94 ; 8989.89,2153.94 8989.89,3203.94 ; 10323.5,2153.94 10323.5,3203.94 ; 11413.18,2153.94 11413.18,3203.94 ; -412.5,2153.94 12815.78,2153.94 12815.78,3203.94 -412.5,3203.94 -412.5,2153.94
  text "Symbol" at -322.5,3098.94 h72
  text "Count" at 183.38,3098.94 h72
  text "Hole Size" at 773.22,3098.94 h72
  text "Plated" at 1892.89,3098.94 h72
  text "Hole Type" at 2398.77,3098.94 h72
  text "Drill Layer Pair" at 3132.57,3098.94 h72
  text "Via/Pad" at 4322.23,3098.94 h72
  text "Pad Shape" at 4912.07,3098.94 h72
  text "Template" at 5657.87,3098.94 h72
  text "Description" at 6847.52,3098.94 h72
  text "Hole Tolerance (+)" at 7701.29,3098.94 h72
  text "Hole Tolerance (-)" at 9034.89,3098.94 h72
  text "Hole Length" at 10368.5,3098.94 h72
  text "Routed Path Length" at 11458.18,3098.94 h72
  text "2" at 183.38,2948.94 h60
  text "23.62mil (0.600mm)" at 773.22,2948.94 h60
  text "PTH" at 1892.89,2948.94 h60
  text "Slot" at 2398.77,2948.94 h60
  text "Top1 - Bottom2" at 3132.57,2948.94 h60
  text "Pad" at 4322.23,2948.94 h60
  text "Rounded" at 4912.07,2948.94 h60
  text "r160_100h60_120r100" at 5657.87,2948.94 h60
  text "47.24mil (1.200mm)" at 10368.5,2948.94 h60
  text "23.62mil (0.600mm)" at 11458.18,2948.94 h60
  text "2" at 183.38,2798.94 h60
  text "23.62mil (0.600mm)" at 773.22,2798.94 h60
  text "PTH" at 1892.89,2798.94 h60
  text "Slot" at 2398.77,2798.94 h60
  text "Top1 - Bottom2" at 3132.57,2798.94 h60
  text "Pad" at 4322.23,2798.94 h60
  text "Rounded" at 4912.07,2798.94 h60
  text "r210_100h60_170r100" at 5657.87,2798.94 h60
  text "66.93mil (1.700mm)" at 10368.5,2798.94 h60
  text "43.31mil (1.100mm)" at 11458.18,2798.94 h60
  text "2" at 183.38,2648.94 h60
  text "25.59mil (0.650mm)" at 773.22,2648.94 h60
  text "PTH" at 1892.89,2648.94 h60
  text "Round" at 2398.77,2648.94 h60
  text "Top1 - Bottom2" at 3132.57,2648.94 h60
  text "Pad" at 4322.23,2648.94 h60
  text "Rounded" at 4912.07,2648.94 h60
  text "c65h65" at 5657.87,2648.94 h60
  text "-" at 10368.5,2648.94 h60
  text "-" at 11458.18,2648.94 h60
  text "3" at 183.38,2498.94 h60
  text "118.11mil (3.000mm)" at 773.22,2498.94 h60
  text "PTH" at 1892.89,2498.94 h60
  text "Round" at 2398.77,2498.94 h60
  text "Top1 - Bottom2" at 3132.57,2498.94 h60
  text "Pad" at 4322.23,2498.94 h60
  text "Rounded" at 4912.07,2498.94 h60
  text "c400h300" at 5657.87,2498.94 h60
  text "-" at 10368.5,2498.94 h60
  text "-" at 11458.18,2498.94 h60
  text "180" at 183.38,2348.94 h60
  text "10.00mil (0.254mm)" at 773.22,2348.94 h60
  text "PTH" at 1892.89,2348.94 h60
  text "Round" at 2398.77,2348.94 h60
  text "Top1 - Bottom2" at 3132.57,2348.94 h60
  text "Via" at 4322.23,2348.94 h60
  text "Rounded" at 4912.07,2348.94 h60
  text "v46h25m0mx0" at 5657.87,2348.94 h60
  text "-" at 10368.5,2348.94 h60
  text "-" at 11458.18,2348.94 h60
  text "189 Total" at 183.38,2198.94 h60
  text "Slot definitions :" at -322.5,2053.97 h60
  text "Routed Path Length" at 710.19,2053.97 h60
  text "= Calculated from tool start centre position to tool end centre position." at 1812.86,2053.97 h60
  text "Hole Length" at 710.19,1953.99 h60
  text "= Routed Path Length + Tool Size = Slot length as defined in the PCB layout" at 1402.99,1953.99 h60